# Altium PCB li-ion-battery-protection-circuit-PCB.PcbDoc
Units mm, origin at the board's own origin, x right, y up, seen from the top; angles counter-clockwise.
Board outline 29.2 x 29.2 mm, 2 copper layers (Top Layer, Bottom Layer); 6 components, 8 nets, 21 pads, 2 vias.
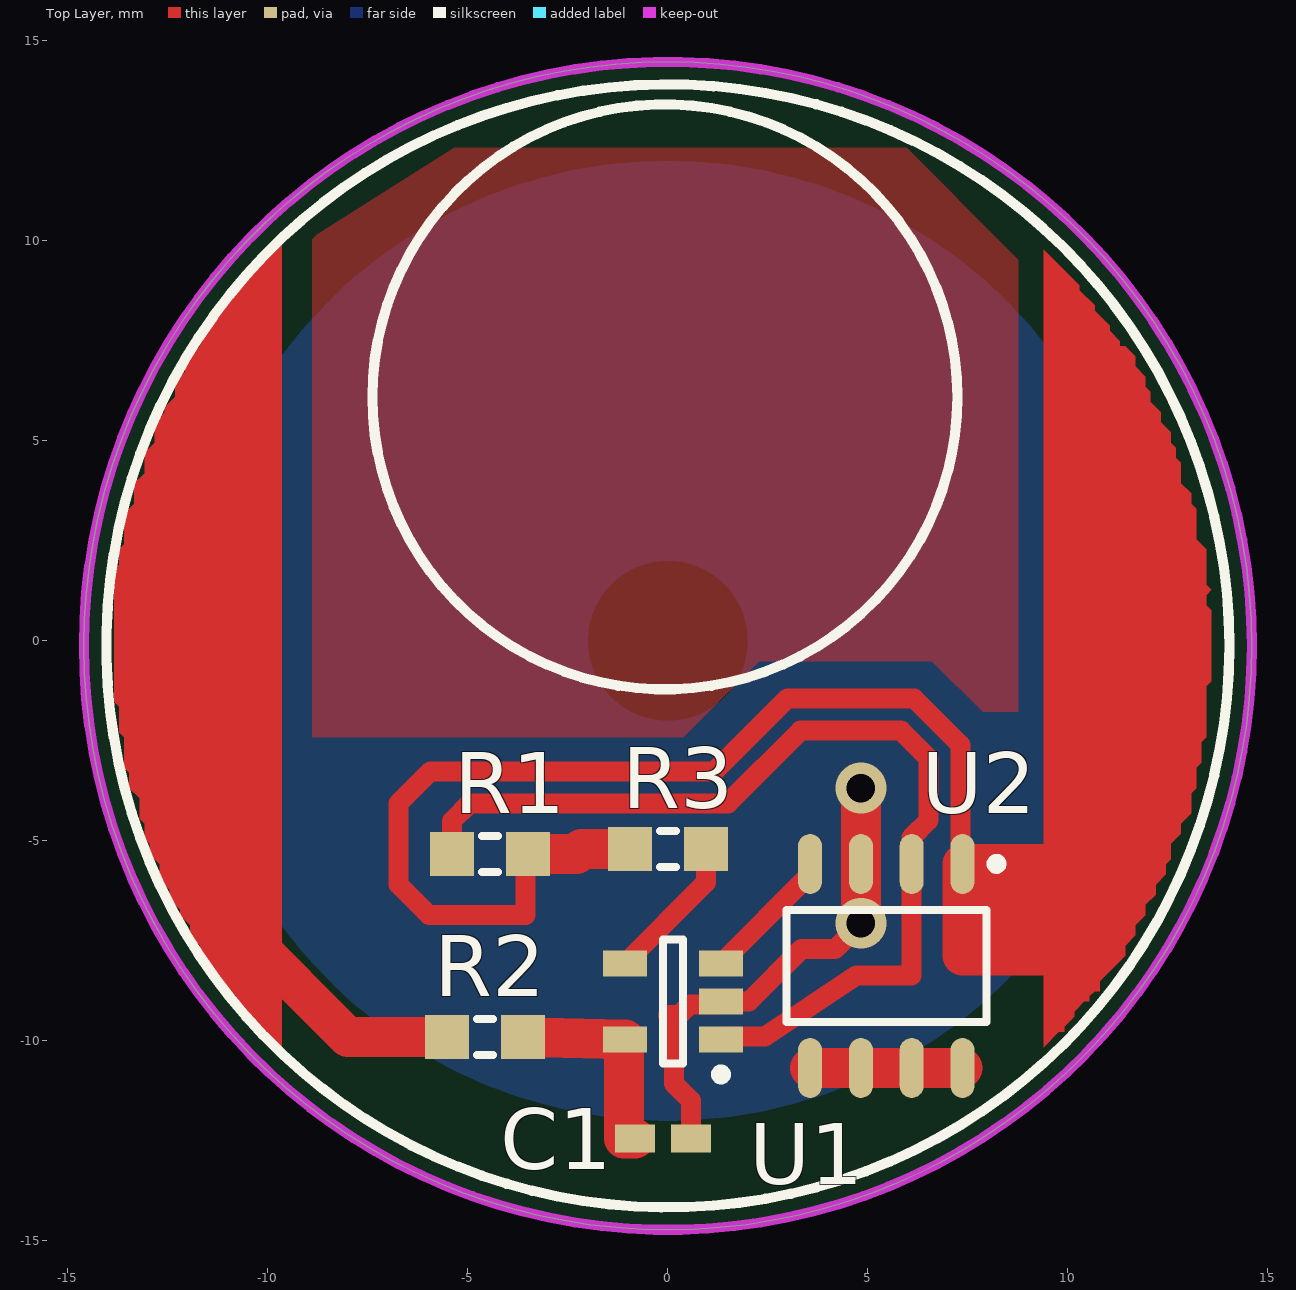
[diagram p0: Top Layer view]
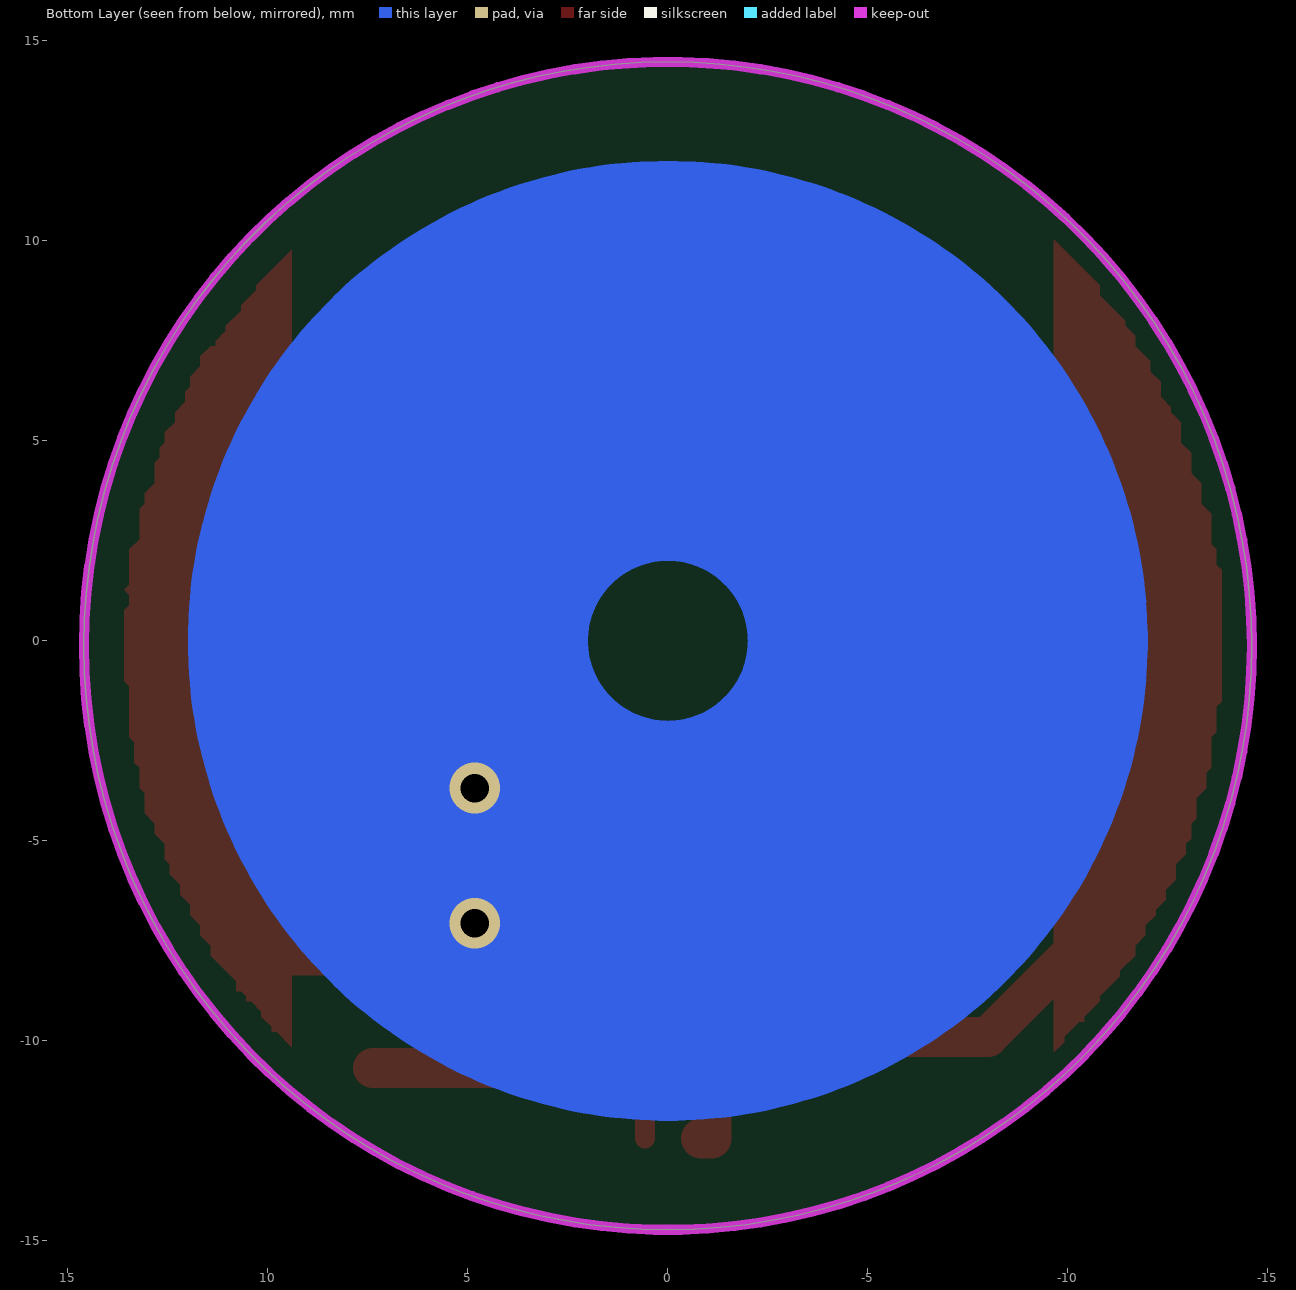
[diagram p1: Bottom Layer view, seen from below]

## Layer stack, top to bottom
Top Layer: signal copper 0.0356
Dielectric: dielectric 0.32, FR-4, Dk 4.8
Bottom Layer: signal copper 0.0356

## Board outline
-14.6,-0.127 ccw(c0,-0.127) 0,-14.727 ccw(c0,-0.127) 14.6,-0.127 ccw(c0,-0.127) 0,14.473 ccw(c0,-0.127)

## Design rules (kind name [scope] priority, off if disabled: settings)
Clearance [All] p1: gap=0.3
PolygonConnect [All] p1: connectstyle=Relief reliefconductorwidth=0.254 reliefentries=4 polygonreliefangle="90 Angle"
RoutingVias [All] p1: holewidth=0.711 width=1.27 viastyle="Through Hole" minholewidth=0.711 minwidth=1.27 maxholewidth=0.711 maxwidth=1.27
SilkscreenOverComponentPads [All] p1: minsilkscreentomaskgap=0.254
SolderMaskExpansion [All] p1: expansion=0.102
Width [All] p1: maxlimit=20 minlimit=0.5 preferedwidth=1
27 further rules are at their usual default settings.

## Components (designator, comment, footprint, x,y, rotation, side; value= is the part's Value field where it differs from the comment)
C1 "Cap Semi" CAPC1005M -0.127,-12.446 r180 top
R1 "Res3" RESC1608M -4.445,-5.334 r0 top
R2 "Res3" RESC1608M -4.572,-9.906 r180 top
R3 "Res3" RESC1608M 0,-5.207 r180 top
U1 "AIC1821" SOT23-5AN 0.127,-9.017 r180 top
U2 "Si9926DY" SOIC127P600-8BL 5.461,-8.128 r270 top

## Footprints (in the part's own frame and the unit in brackets; to place one, negate y for a bottom-side part, rotate by r counter-clockwise, add the part's x,y. Pads: shape width x height; smd on the part's side, far side on the other; paste and mask are expansions set on the pad)
CAPC1005M [mm] "Chip Capacitor, Body 1.0x0.5mm, IPC Low Density"
  rect 1x0.7 smd: 1(-0.7,0) 2(0.7,0)
  body extent -0.55,-0.3 0.55,0.3, height 0.6
RESC1608M [mm] "Chip Resistor, Body 1.6x0.8mm, IPC Low Density"
  rect 1.1x1.1 smd: 1(-0.95,0) 2(0.95,0)
  silkscreen extent -0.2,-0.45 0.2,0.45, body extent -0.85,-0.48 0.85,0.48, height 0.6
SOIC127P600-8BL [mm] "SOIC, 8-Leads, Body 4.9x3.9mm, Pitch 1.27mm, IPC High Density"
  oval 1.5x0.6 smd: 1(-2.55,1.905) 2(-2.55,0.635) 3(-2.55,-0.635) 4(-2.55,-1.905) 5(2.55,-1.905) 6(2.55,-0.635) 7(2.55,0.635) 8(2.55,1.905)
  silkscreen extent -2.67,-2.5 1.4,2.88, body extent -2,-2.5 2,2.5, height 2.59
SOT23-5AN [mm] "SOT23, 5-Leads, Body 2.9x1.6mm, Pitch 0.95mm, Lead Span 2.8mm, IPC Medium Density"
  rect 1.1x0.65 smd: 1(-1.2,0.95) 2(-1.2,0) 3(-1.2,-0.95) 4(1.2,-0.95) 5(1.2,0.95)
  silkscreen extent -1.33,-1.55 0.25,1.95, body extent -0.9,-1.55 0.9,1.55, height 1.45

## Part data
C1: "LMK105BJ104KV-F"
R1: "ERJ-3GEYJ106V"
R2: "ERJ-3GEYJ101V"
R3: "ERJ-3GEYJ104V"
U1: library part Component_1, "lithium ion cell protection IC"
U2: library part Component_1, "dual n channel mosfets"

## Via types
v1: diameter 1.27, hole 0.711, Top Layer to Bottom Layer, 2 vias

## Nets (pads, with @x,y where several pads share a name; then routed paths per layer and width w, separated by ;. In a path a pad name is that pad's centre, name@x,y a point inside that pad or via, vN(x,y) a via of type N, cw(c..) or ccw(c..) an arc to the next point about the centre after c; other vN are vias at no path point)
BATT_NEG: C1.1 U1.2 U2.3 | length 72.5
  Top Layer w0.5: C1.1 0.573,-11.495 0.148,-11.07 0.148,-10.279 0.027,-10.279 0.027,-9.387 0,-9.36 0.281,-9.36 0.549,-9.092 1.252,-9.092 U1.2 2.03,-9.017 3.338,-7.709 4.178,-7.709 v1(4.826,-7.061)
  Top Layer w1: v1(4.826,-7.061) U2.3 v1(4.826,-3.683)
  Bottom Layer w1: 3.073,-3.912 3.073,-5.309 3.693,-5.929 v1(4.826,-7.061) 6.604,-5.283 ; 6.985,0 6.913,-1.002 ; 6.604,-5.283 6.913,-1.002 ; 6.604,-5.283 6.913,-1.002
  Bottom Layer w10: 7,0 ccw(c0,0) 7,0
BATT_POS: R2.2 | length 6.1
  Top Layer w1: -10.541,-7.366 -8.001,-9.906 R2.2
GND: R1.2 R3.2 U2.1 | length 41.1
  Top Layer w0.5: R1.2 -3.556,-5.395 -3.556,-6.858 -5.969,-6.858 -6.731,-6.096 -6.731,-4.064 -5.931,-3.264 1.168,-3.264 2.988,-1.444 6.156,-1.444 7.319,-2.607 7.319,-5.531 U2.1
  Top Layer w1: R1.2 -2.286,-5.334 -2.159,-5.207 R3.2 ; 9.779,-7.874 7.366,-7.874 7.366,-7.112 ; 9.906,-7.112 7.366,-7.112 ; 10.15,-5.578 U2.1 7.366,-6.35 ; 10.16,-6.35 7.366,-6.35 ; 7.366,-7.112 7.366,-6.35
NetC1_2: C1.2 R2.1 U1.5 | length 5.3
  Top Layer w1: R2.1 U1.5@-1.092,-9.967 ; U1.5 U1.5@-1.092,-9.967 ; C1.2 -1.092,-12.446 U1.5@-1.092,-9.967
NetR1_1: R1.1 U1.1 U2.2 | length 24.8
  Top Layer w0.5: R1.1 -5.395,-4.506 -4.953,-4.064 1.499,-4.064 3.319,-2.244 5.825,-2.244 6.519,-2.938 6.519,-4.491 6.096,-4.914 U2.2 6.096,-8.367 4.714,-8.367 2.427,-9.892 1.402,-9.892 U1.1
NetR3_1: R3.1 U1.4 | length 3.7
  Top Layer w0.5: U1.4 0.95,-6.044 R3.1
NetU1_3: U1.3 U2.4 | length 3.4
  Top Layer w0.5: U1.3 3.556,-5.838 U2.4
NetU2_5: U2.5 U2.6 U2.7 U2.8 | length 3.8
  Top Layer w1: U2.5 U2.6 U2.7 U2.8

## Polygon pours and split planes (outlines as drawn)
no net on Top Layer "Top Layer-No Net" (solid, pour order 2): -8.763,10.16 -8.89,10.033 -8.89,-2.413 0.381,-2.413 2.286,-0.508 3.175,-0.508 6.604,-0.508 7.874,-1.778 8.763,-1.778 8.763,9.525 8.509,9.779 5.969,12.319 1.524,12.319 -5.334,12.319

## Keep-outs
Keep-Out Layer:
  circle w0.254: c0,-0.127 r14.6

## Other copper
Top Layer:
  region net BATT_POS: -9.652,10.033 -10.795,8.89 -10.795,8.636 -11.43,8.001 -11.43,7.874 -11.684,7.62 -11.684,7.366 -12.065,6.985 -12.065,6.731 -12.319,6.477 -12.319,6.096 -12.573,5.842 -12.573,5.715 -12.827,5.461 -12.827,4.953 -13.081,4.699 -13.081,4.191 -13.335,3.937 -13.335,3.429 -13.589,3.175 -13.589,2.413 -13.716,2.286 -13.716,1.905 -13.843,1.778 -13.843,-1.524 -13.716,-1.651 -13.716,-2.286 -13.589,-2.413 -13.589,-3.175 -13.462,-3.302 -13.462,-3.683 -13.208,-3.937 -13.208,-4.445 -13.081,-4.572 -13.081,-4.953 -12.954,-5.08 -12.954,-5.334 -12.7,-5.588 -12.7,-5.969 -12.446,-6.223 -12.446,-6.477 -12.192,-6.731 -12.192,-6.858 -11.938,-7.112 -11.938,-7.366 -11.684,-7.62 -11.684,-7.874 -11.303,-8.255 -11.303,-8.382 -10.795,-8.89 -10.795,-9.017 -10.414,-9.398 -10.414,-9.525 -10.287,-9.525 -9.906,-9.906 -9.906,-10.033 -9.652,-10.287
  region net GND: 9.398,9.779 10.287,8.89 10.287,8.763 10.668,8.382 10.668,8.255 11.049,7.874 11.049,7.747 11.303,7.493 11.303,7.366 11.43,7.366 11.684,7.112 11.684,6.858 11.938,6.604 11.938,6.35 12.065,6.223 12.065,5.969 12.319,5.715 12.319,5.461 12.573,5.207 12.573,4.953 12.7,4.826 12.7,4.572 12.827,4.445 12.827,3.937 13.081,3.683 13.081,3.429 13.208,3.302 13.208,2.54 13.462,2.286 13.462,1.397 13.589,1.27 13.462,1.143 13.462,0.889 13.589,0.762 13.589,-1.016 13.462,-1.143 13.462,-2.413 13.335,-2.54 13.335,-3.048 13.208,-3.175 13.208,-3.683 13.081,-3.81 13.081,-4.318 12.827,-4.572 12.827,-4.826 12.573,-5.08 12.573,-5.461 12.446,-5.588 12.446,-5.842 12.192,-6.096 12.192,-6.35 11.938,-6.604 11.938,-6.858 11.684,-7.112 11.684,-7.366 11.43,-7.62 11.43,-7.874 10.795,-8.509 10.795,-8.763 10.668,-8.763 10.541,-8.89 10.541,-9.017 10.414,-9.017 10.16,-9.271 10.16,-9.398 9.906,-9.652 9.906,-9.779 9.779,-9.779 9.398,-10.16

## Silkscreen, mask and mechanical layers (free items; w line width, h text height)
Top Overlay:
  circle w0.254: c-0.074,6.096 r7.313
  circle w0.254: c0,-0.127 r14.038
Top Solder:
  region: 9.398,-10.16 10.668,-8.89 10.668,-8.636 11.176,-8.128 11.176,-7.874 11.811,-7.239 11.811,-6.731 12.192,-6.35 12.192,-5.969 12.7,-5.461 12.7,-4.826 12.954,-4.572 12.954,-3.937 13.208,-3.683 13.208,-2.54 13.335,-2.413 13.335,-1.143 13.589,-0.889 13.589,0.127 13.462,0.254 13.462,1.27 13.335,1.397 13.335,2.413 13.081,2.667 13.081,3.683 12.573,4.191 12.573,4.826 12.192,5.207 12.192,5.842 11.684,6.35 11.684,6.858 11.176,7.366 11.176,7.747 10.541,8.382 10.541,8.509 9.906,9.144 9.779,9.144 9.779,9.271 9.525,9.525 9.398,9.525
  region: -9.652,9.525 -9.652,-10.16 -9.779,-10.16 -10.668,-9.271 -10.668,-9.144 -11.43,-8.382 -11.43,-8.001 -12.065,-7.366 -12.065,-7.112 -12.573,-6.604 -12.573,-5.969 -13.208,-5.334 -13.208,-4.572 -13.462,-4.318 -13.462,-3.683 -13.843,-3.302 -13.843,-1.778 -13.97,-1.651 -13.97,-0.635 -14.097,-0.508 -14.097,0.762 -13.843,1.016 -13.843,2.286 -13.716,2.413 -13.716,3.556 -13.208,4.064 -13.208,4.826 -12.827,5.207 -12.827,5.842 -12.192,6.477 -12.192,7.239 -11.43,8.001 -11.43,8.255 -9.906,9.779 -9.779,9.652
  lines w0.254: 9.462,9.525 cw(c-0.413,-0.286) 9.592,-9.963
Bottom Solder:
  circle w9: c0,0 r7.184